# Altium PCB PCB1.PcbDoc
Units mil, origin at the board's own origin, x right, y up, seen from the top; angles counter-clockwise.
Board outline 6000 x 4000 mil, 2 copper layers (Top Layer, Bottom Layer); 18 components, 8 nets, 50 pads, 0 vias.
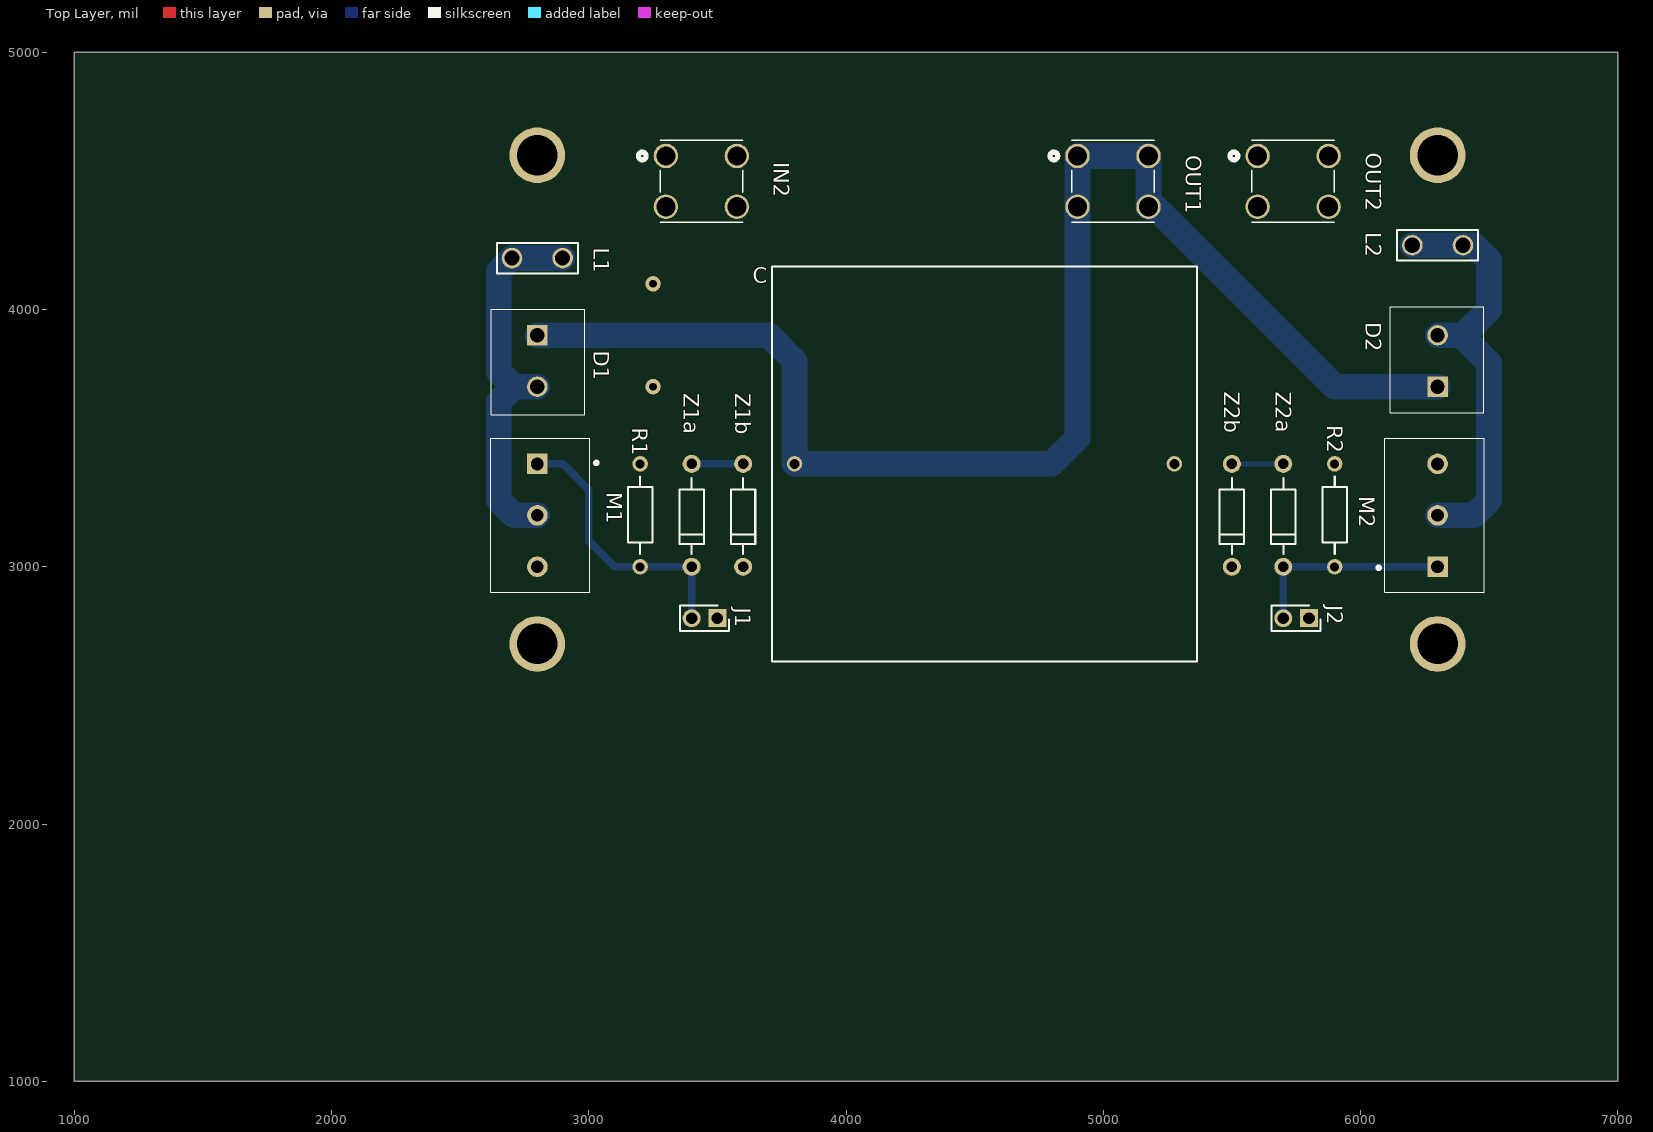
[diagram p0: Top Layer view]
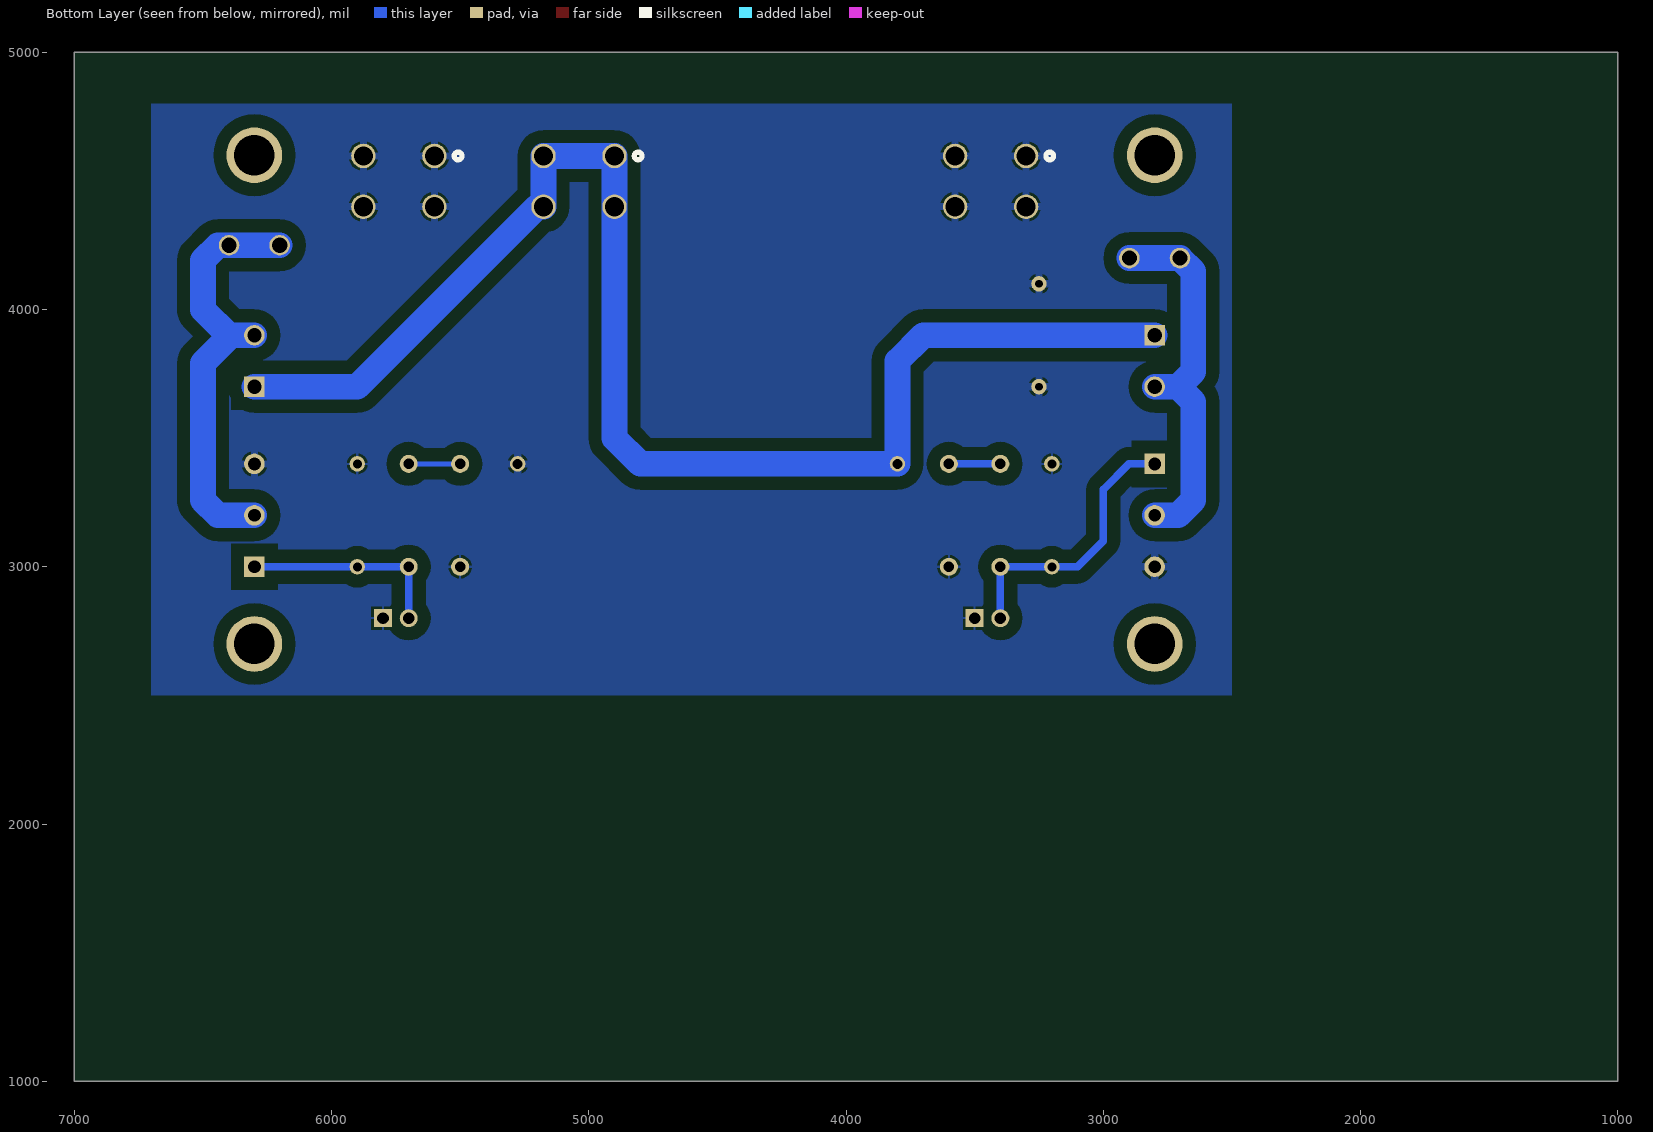
[diagram p1: Bottom Layer view, seen from below]
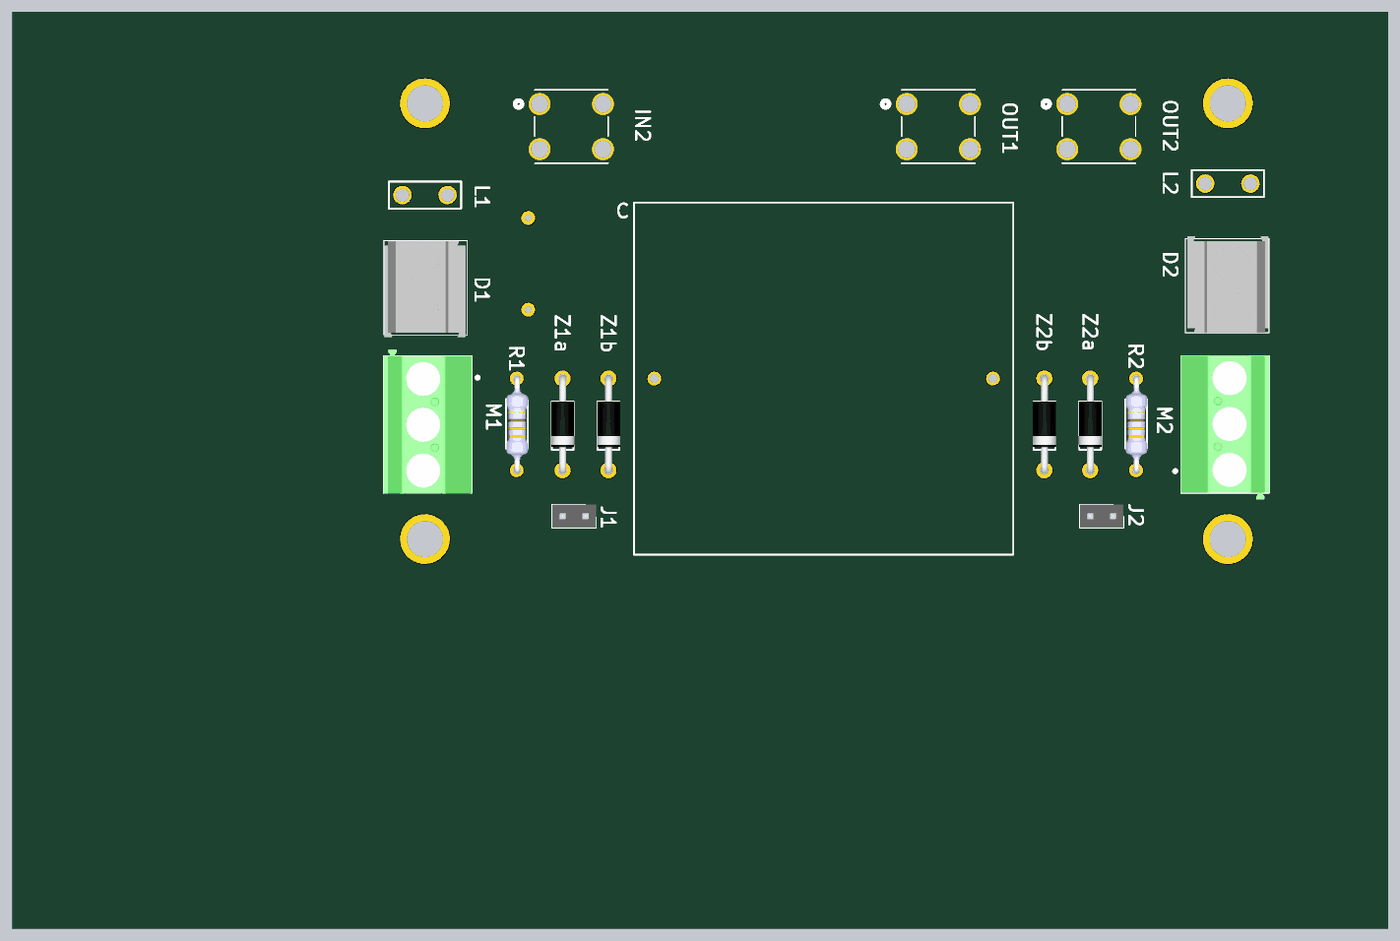
[diagram p2: 3D render of the assembled board from above, using the file's embedded part models]

## Layer stack, top to bottom
Top Solder: solder mask 0.4, Solder Resist, Dk 3.5
Top Layer: signal copper 1.4
Dielectric 1: dielectric 12.6, FR-4, Dk 4.8
Bottom Layer: signal copper 1.4
Bottom Solder: solder mask 0.4, Solder Resist, Dk 3.5

## Board outline
1000,1000 7000,1000 7000,5000 1000,5000

## Design rules (kind name [scope] priority, off if disabled: settings)
Clearance [All] p1: gap=10 ignorepadtopadclearanceinfootprint=FALSE except(0: Arc-Hole Track-Hole SMDPad-Hole THPad-Hole Via-Hole Fill-Hole Poly-Hole Region-Hole Text-Hole; 50: Track-Track Track-THPad Track-Via Track-Poly THPad-Via THPad-Poly Via-Via Via-Poly Poly-Poly)
HoleSize [All] p1: absolutevalues=TRUE maxlimit=200 minlimit=1 maxpercent=80.000 minpercent=20.000
PolygonConnect [All] p1: connectstyle=Relief reliefconductorwidth=10 reliefentries=4 polygonreliefangle="90 Angle" airgapwidth=10
RoutingVias [All] p1: holewidth=28 width=50 viastyle="Through Hole" minholewidth=28 minwidth=50 maxholewidth=28 maxwidth=50
SilkToSolderMaskClearance [IsPad] p1: minsilkscreentomaskgap=5 clearancetoexposedcopper=TRUE
SolderMaskExpansion [All] p1: expansion=4 istentingtop=FALSE
Width [All] p1: maxlimit=100 minlimit=20 preferedwidth=100
28 further rules are at their usual default settings.

## Components (designator, comment, footprint, x,y, rotation, side; value= is the part's Value field where it differs from the comment)
C "CAP" CAPACITOR 5276.38,3400 r180 top
D1 "TB004-508-02BE" TERMINAL_CIN_TH_2P_5.08 2800,3700 r270 top
D2 "TB004-508-02BE" TERMINAL_CIN_TH_2P_5.08 6300,3900 r90 top
IN2 "8191" CONN_8191_KEY 3300,4597 r0 top
J1 "TB004-508-02BE" HEADER_MALE_TH_2P_2.54 3500,2800 r90 top
J2 "TB004-508-02BE" HEADER_MALE_TH_2P_2.54 5800,2800 r90 top
L1 "8191" TermIND 2800,4200 r180 top
L2 "8191" TermIND 6300,4250 r180 top
M1 "1546551-3" TERMINAL_TH_3P_5.08 2800,3400 r270 top
M2 "1546551-3" TERMINAL_TH_3P_5.08 6300,3000 r90 top
OUT1 "8191" CONN_8191_KEY 4900,4597 r0 top
OUT2 "8191" CONN_8191_KEY 5600,4597 r0 top
R1 "Res1" RESIS_TH_10.1 3200,3400 r270 top
R2 "Res1" RESIS_TH_10.1 5900,3400 r270 top
Z1a "TLHR5400-AS12Z" DIODE_TH_10.1 3400,3000 r90 top
Z1b "TLHR5400-AS12Z" DIODE_TH_10.1 3600,3000 r90 top
Z2a "TLHR5400-AS12Z" DIODE_TH_10.1 5700,3000 r90 top
Z2b "TLHR5400-AS12Z" DIODE_TH_10.1 5500,3000 r90 top

## Footprints (in the part's own frame and the unit in brackets; to place one, negate y for a bottom-side part, rotate by r counter-clockwise, add the part's x,y. Pads: shape width x height; smd on the part's side, far side on the other; paste and mask are expansions set on the pad)
CAPACITOR [mil]
  round 60 hole 39.37: 1(0,0) 2(1476.38,0)
  silkscreen extent -89,-768 1565,768
CONN_8191_KEY [mil]
  round 95 hole 75 mask+0: 1(0,0) 2(276,0) 3(0,-197) 4(276,-197)
  silkscreen extent -107,-258 298,62, body extent 0,0 10,10, height 10
DIODE_TH_10.1 [mil]
  round 70 hole 40: 1(0,0) 2(400,0)
  silkscreen extent 49,-47 345,47, body extent -15,-51 415,50, height 100
HEADER_MALE_TH_2P_2.54 [mil]
  rect 70x70 hole 45: 1(0,0)
  round 70 hole 45: 2(0,100)
  silkscreen extent -50,-45 50,145, body extent -50,-45 50,145, height 338
RESIS_TH_10.1 [mil]
  round 60 hole 35: 1(0,0) 2(400,0)
  silkscreen extent 50,-47 350,47, body extent -12,-45 412,49, height 95
TERMINAL_CIN_TH_2P_5.08 [mil]
  rect 80x80 hole 55: 1(-200,0)
  round 80 hole 55: 2(0,0)
  silkscreen extent -301,-179 110,185, body extent -300,-177 120,177, height 600
TERMINAL_TH_3P_5.08 [mil]
  rect 80x80 hole 50: 1(0,0)
  round 80 hole 50: 2(200,0) 3(400,0)
  silkscreen extent -100,-181 500,236, body extent -128,-181 502,205, height 559
TermIND [mil]
  round 80 hole 59.06: 1(-98.43,0) 1(98.43,0)
  silkscreen extent -157,-59 157,59

## Part data
C: "Capacitor", Manufacturer_Name=Kemet, Manufacturer_Part_Number=C1206X475K3RACAUTO7210, Mouser Part Number=80-C1206X475K3RAUTLR, Datasheet Link=https://www.mouser.com/datasheet/2/212/1/KEM_C1078_X7R_FT_CAP_AUTO_SMD-1103315.pdf, Height=1.95mm, Mouser Price/Stock=https://www.mouser.co.uk/ProductDetail/KEMET/C1206X475K3RACAUTO7210?qs=ds50AKTGxA8JAgT9kv9azQ%3D%3D
D1 D2: library part Con_Terminal_2P, "Connector", Manufacturer_Name="CUI Devices", Mouser Part Number=490-TB004-508-02BE, Arrow Part Number=TB004-508-02BE, Arrow Price/Stock=https://www.arrow.com/en/products/tb004-508-02be/cui-inc, Datasheet Link=https://componentsearchengine.com/Datasheets/1/TB004-508-02BE.pdf, Height=14.1mm, Manufacturer_Part_Number=TB004-508-02BE, Mouser Price/Stock=https://www.mouser.co.uk/ProductDetail/CUI-Devices/TB004-508-02BE?qs=vLWxofP3U2zLwdGzG2tSkA%3D%3D
IN2 OUT1 OUT2: "No Description Available", Mfr_Name="Keystone Electronics", Copyright="Copyright (C) 2022 Ultra Librarian. All rights reserved.", Manufacturer_Part_Number=8191, RefDes=RefDes, Type=DEV
J1 J2: library part Con_Header_2P, "Connector", Manufacturer_Name="CUI Devices", Mouser Part Number=490-TB004-508-02BE, Arrow Part Number=TB004-508-02BE, Arrow Price/Stock=https://www.arrow.com/en/products/tb004-508-02be/cui-inc, Datasheet Link=https://componentsearchengine.com/Datasheets/1/TB004-508-02BE.pdf, Height=14.1mm, Manufacturer_Part_Number=TB004-508-02BE, Mouser Price/Stock=https://www.mouser.co.uk/ProductDetail/CUI-Devices/TB004-508-02BE?qs=vLWxofP3U2zLwdGzG2tSkA%3D%3D
L1 L2: library part 2Pins, "No Description Available", Mfr_Name="Keystone Electronics", Copyright="Copyright (C) 2022 Ultra Librarian. All rights reserved.", Manufacturer_Part_Number=8191, RefDes=RefDes, Type=DEV
M1 M2: library part Con_Terminal_3P, "Terminal", Manufacturer_Name="TE Connectivity", Mouser Part Number=571-1546551-3, Arrow Part Number=1546551-3, Arrow Price/Stock=https://www.arrow.com/en/products/1546551-3/te-connectivity, Datasheet Link=https://www.te.com/commerce/DocumentDelivery/DDEController?Action=srchrtrv&DocNm=1546551&DocType=Customer+Drawing&DocLang=English&DocFormat=pdf&PartCntxt=1546551-3, Height=8.5mm, Manufacturer_Part_Number=1546551-3, Mouser Price/Stock=https://www.mouser.co.uk/ProductDetail/TE-Connectivity/1546551-3?qs=m%2FhmcwQ75LlRawcWGeRFDA%3D%3D
R1 R2: library part Resistor, "Resistor", LatestRevisionDate=17-Jul-2002, LatestRevisionNote="Re-released for DXP Platform.", Name==Value, PackageDescription="Axial Device, Thru-Hole; 2 Leads; 0.3 in Pin Spacing", PackageReference=AXIAL-0.3, Published=8-Jun-2000, Publisher="Altium Limited"
Z1a Z1b Z2a Z2b: library part Diode, "Diode", Manufacturer_Name=Vishay, Datasheet Link=http://www.vishay.com/docs/83012/tlhg540.pdf, Height=12.8mm, Manufacturer_Part_Number=TLHR5400-AS12Z

## Free pads (board coordinates)
  round 216.54 hole 157.48: 1(2800,2700) 1(2800,4600) 1(6300,2700) 1(6300,4600)
  round 60 hole 30: 1(3250,3700) 1(3250,4100)

## Nets (pads, with @x,y where several pads share a name; then routed paths per layer and width w, separated by ;. In a path a pad name is that pad's centre, name@x,y a point inside that pad or via, vN(x,y) a via of type N, cw(c..) or ccw(c..) an arc to the next point about the centre after c; other vN are vias at no path point)
G1: J1.2 M1.1 R1.2 Z1a.1 | length 1082.8
  Bottom Layer w30: M1.1 2900,3400 3000,3300 3000,3100 3100,3000 R1.2 Z1a.1 J1.2
G2: J2.2 M2.1 R2.2 Z2a.1 | length 800
  Bottom Layer w30: J2.2 Z2a.1 R2.2 M2.1
GND: C.1 IN2.1 IN2.2 IN2.3 IN2.4 J1.1 J2.1 M1.3 M2.3 OUT2.1 OUT2.2 OUT2.3 OUT2.4 pad.1@3250,3700 pad.1@3250,4100 R1.1 R2.1 Z1b.1 Z2b.1
L1D1: D1.2 L1.1 M1.2 | length 1473.8
  Bottom Layer w100: M1.2 2708.58,3200 2650,3258.58 2650,3641.42 2708.58,3700 ; D1.2 2708.58,3700 ; L1.1@2898.43,4200 2701.57,4200 2650,4148.43 2650,3758.58 2679.29,3729.29 2708.58,3700
L2D2: D2.2 L2.1 M2.2 | length 1663.7
  Bottom Layer w100: L2.1@6201.57,4250 6398.43,4250 6441.42,4250 6500,4191.42 6500,4000 6395.71,3895.71 ; M2.2 6441.42,3200 6500,3258.58 6500,3791.42 6391.42,3900 D2.2
OUT1: C.2 D1.1 D2.1 OUT1.1 OUT1.2 OUT1.3 OUT1.4 | length 5566.8
  Bottom Layer w100: D1.1 3700,3900 3800,3800 C.2 4800,3400 4900,3500 OUT1.3 OUT1.1 OUT1.2 OUT1.4 5200,4400 5900,3700 D2.1
Z1: Z1a.2 Z1b.2 | length 200
  Bottom Layer w30: Z1a.2 Z1b.2
Z2: Z2a.2 Z2b.2 | length 200
  Bottom Layer w20: Z2b.2 Z2a.2

## Polygon pours and split planes (outlines as drawn)
GND on Bottom Layer "GND_L02_P000" (solid, pour order 0): 2500,4800 6700,4800 6700,2500 2500,2500